# EAGLE board untitled (EAGLE 5.11)
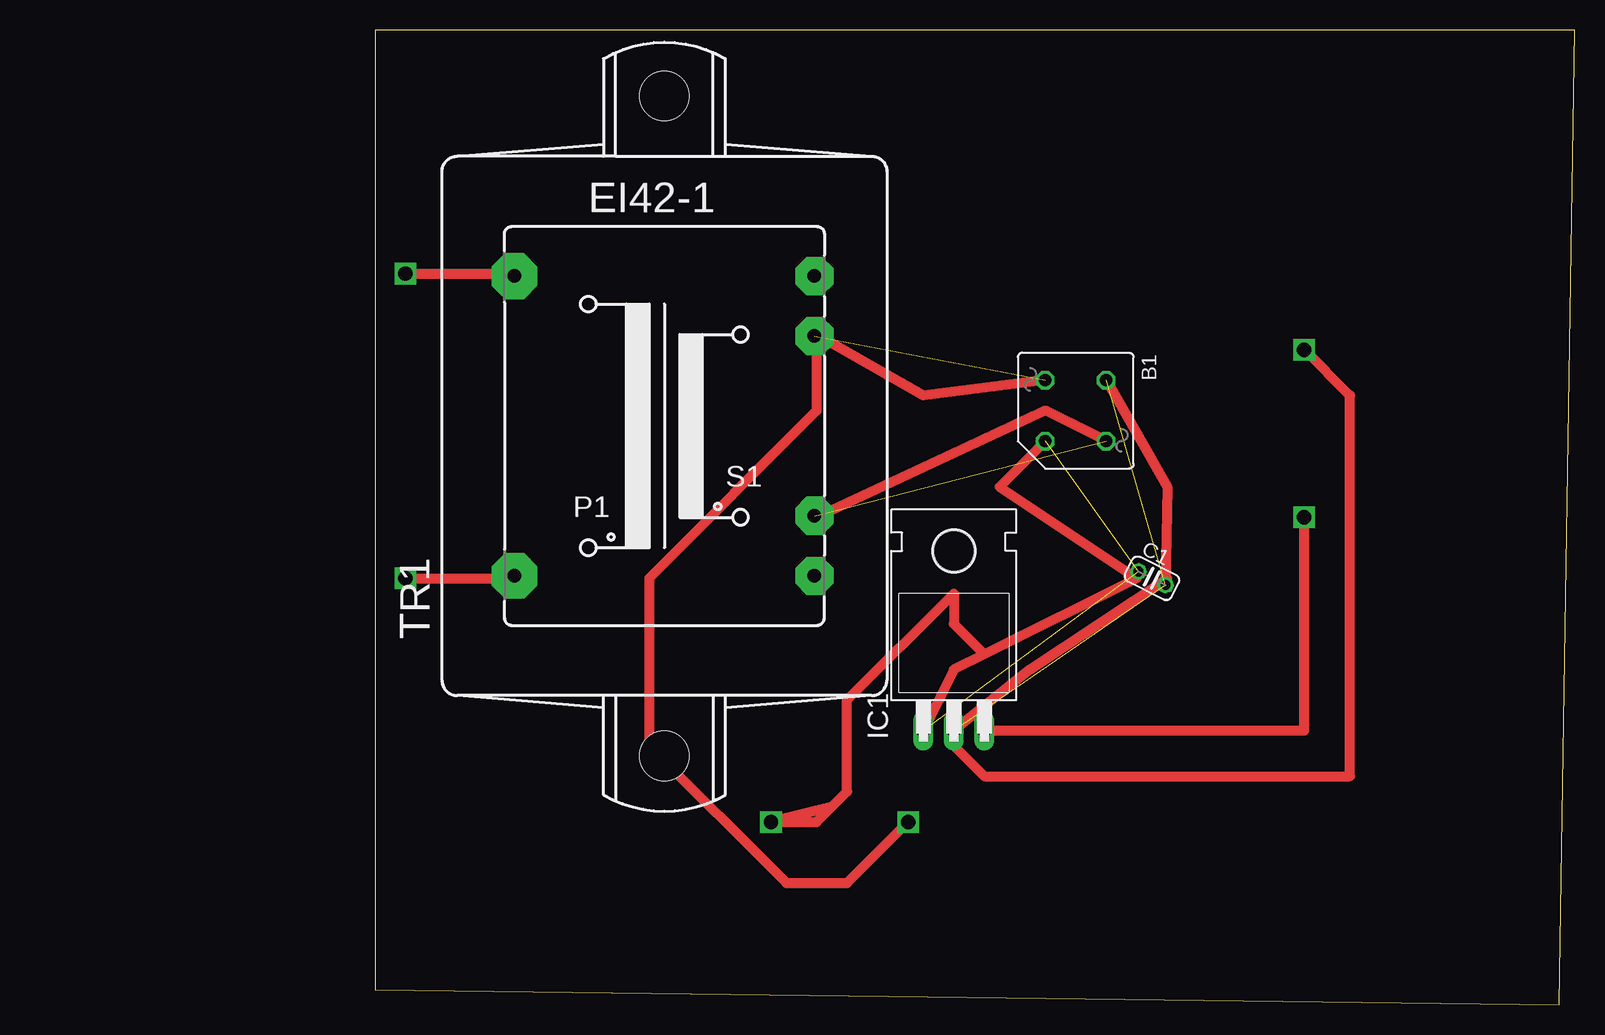
[diagram p0: board, top side]
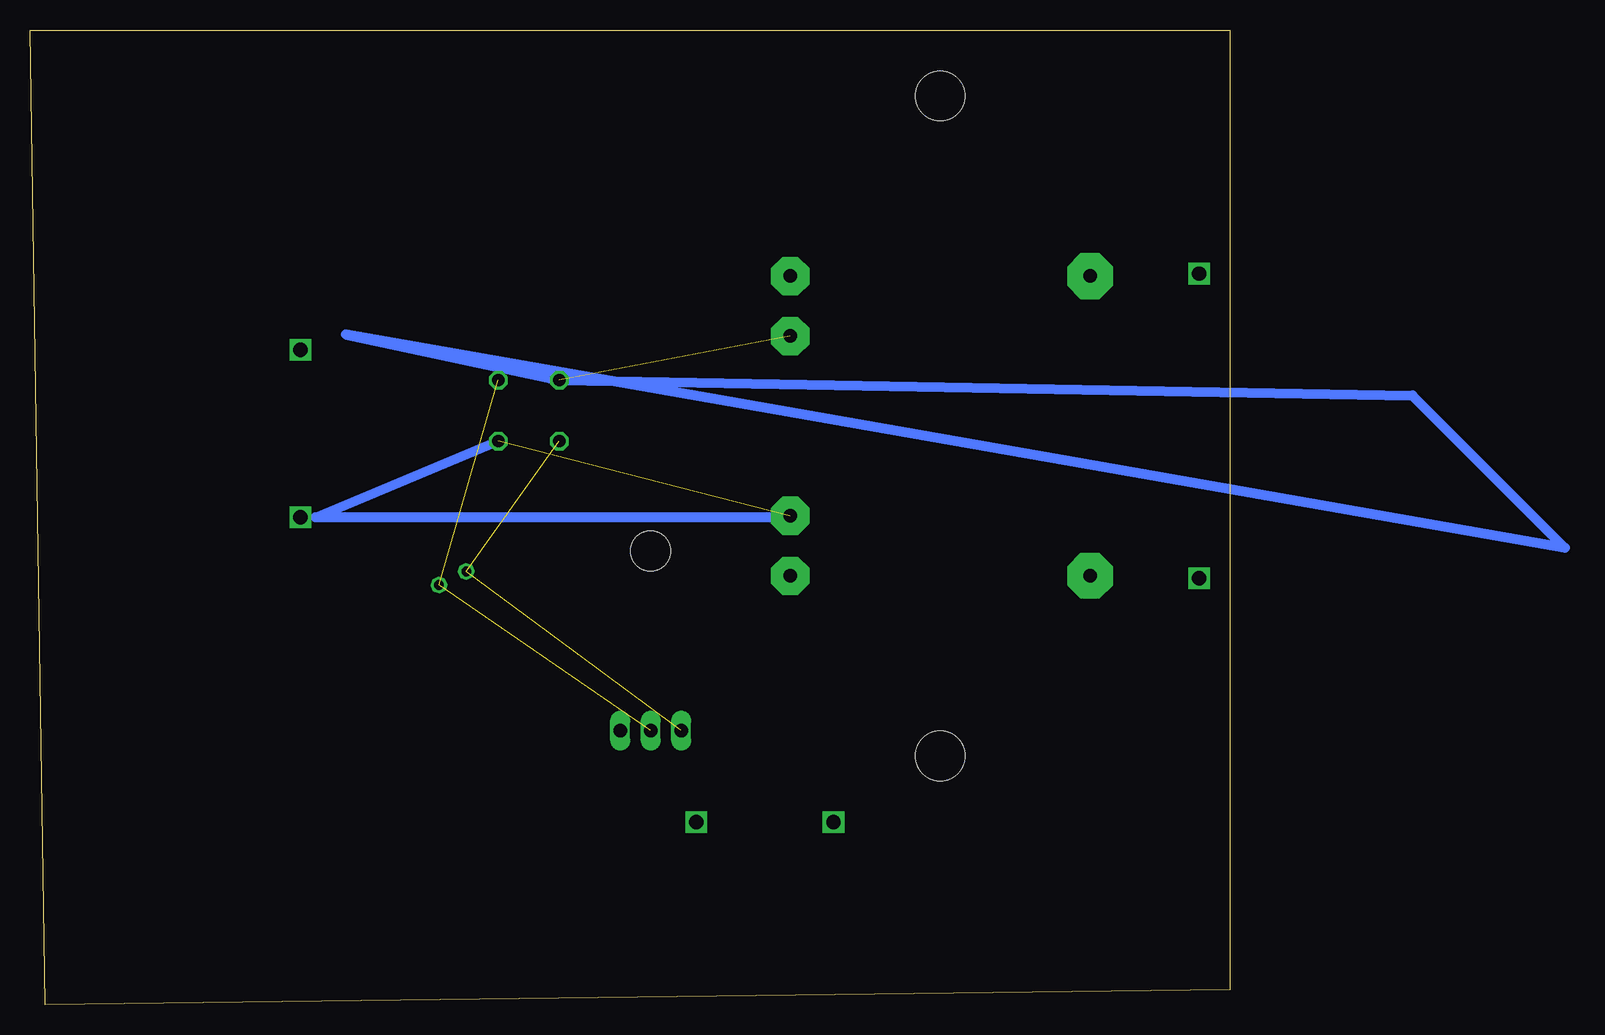
[diagram p1: board, bottom side, seen from below]

Size 100 x 81.27 mm. Coordinates in mm from the lower left corner, seen from the top.
Outline: 0,1.27 98.73,0 100,81.27 0,81.27 0,1.27
Copper layers (1*16): Top 0.035mm / dielectric 1.5mm / Bottom 0.035mm
Design rules "default": minimum track width 10mil, minimum drill 24mil, track to track 8mil, track to pad 8mil, pad to pad 8mil, via to via 8mil, smd to smd 8mil, copper to edge 40mil, drill to drill 8mil, minimum pad ring 10mil, minimum via ring 8mil, stop-mask expansion 4mil, vias tented up to drill 0mil, thermal gap 10mil

## Footprints (pad centres in the part's own frame; a part is rotated, then mirrored left to right if it is on the bottom)
1KAB = drill 1.016 octagon: + 2.54,-2.54; - -2.54,2.54; AC1 -2.54,-2.54; AC2 2.54,2.54
C025-024X044 = drill 0.813 octagon: 1 -1.27,0; 2 1.27,0
TO220H = drill 1.118 long: 1 -2.54,-10.16; 2 0,-10.16; 3 2.54,-10.16 | hole 3.302: 0,4.826
EI42-1B = drill 1.118 pad 3.81 octagon: 1 -12.497,12.497; 5 -12.497,-12.497 | drill 1.118 pad 3.175 octagon: 6 12.497,-12.497; 7 12.497,-7.493; 9 12.497,7.493; 10 12.497,12.497 | hole 4.115: 0,-27.508; 0,27.508

## Placement (x,y rotation side)
B1  [1KAB]  58.42,49.53 270 top
C1  [C025-024X044]  64.77,35.56 333.5 top
IC1  LM340H-05  [TO220H]  48.26,33.02 0 top
TR1  [EI42-1B]  24.13,48.26 0 top

## Library data of the parts
B1 = rectifier
C1 = resistor
IC1 = linear
TR1 = trafo

## Nets
N$1: B1.AC1 TR1.9
N$2: B1.AC2 TR1.7
N$3: B1.+ C1.1 IC1.1
N$4: B1.- C1.2 IC1.2
N$7: IC1.3

## Tracks (layer width: path | path; a pad name or v marks a point on that pad's centre or on a via)
N$1  (via drill 1.2)  (1 unrouted)
  Top 0.813: B1.AC1 45.72,50.8 36.83,55.88 36.83,49.53 22.86,35.56 22.86,21.59 34.29,10.16 39.37,10.16 v44.45,15.24
  Bottom 0.813: -27.94,38.1 73.66,55.88 B1.AC1 -15.24,50.8 -27.94,38.1
N$2  (1 unrouted)
  Top 0.813: B1.AC2 55.88,49.53 36.83,40.64
  Bottom 0.813: 36.83,40.64 76.2,40.64 B1.AC2
N$3  (via drill 1.2)  (2 unrouted)
  Top 0.813: 50.8,29.21 63.5,35.56 52.07,43.18 B1.+ | 50.8,29.21 48.26,27.94 IC1.1 | 38.1,16.51 v33.02,15.24 36.83,15.24 39.37,17.78 39.37,25.4 48.26,34.29 48.26,31.75 50.8,29.21
N$4  (via drill 1.2)  (2 unrouted)
  Top 0.813: B1.- 66.04,43.18 C1.2 | 66.04,35.56 54.61,27.94 IC1.2 48.26,21.59 50.8,19.05 81.28,19.05 81.28,50.8 v77.47,54.61
N$5  (via drill 1.2)
  Top 0.813: v2.54,60.96 11.43,60.96 12.7,60.96
N$6  (via drill 1.2)
  Top 0.813: v2.54,35.56 11.43,35.56
N$7  (via drill 1.2)
  Top 0.813: IC1.3 77.47,22.86 v77.47,40.64
S$1  (via drill 0.6)
  other vias: -60.96,52.07